# Altium PCB Insole_ver1_42.PcbDoc (part 3 of 3)
Units mm, origin at the board's own origin, x right, y up, seen from the top; angles counter-clockwise.
Board outline 154.9 x 260.57 mm, 2 copper layers (Top Layer, Bottom Layer); 254 components, 50 nets, 803 pads, 0 vias.
Unrouted connection lines stored in the file: 477.
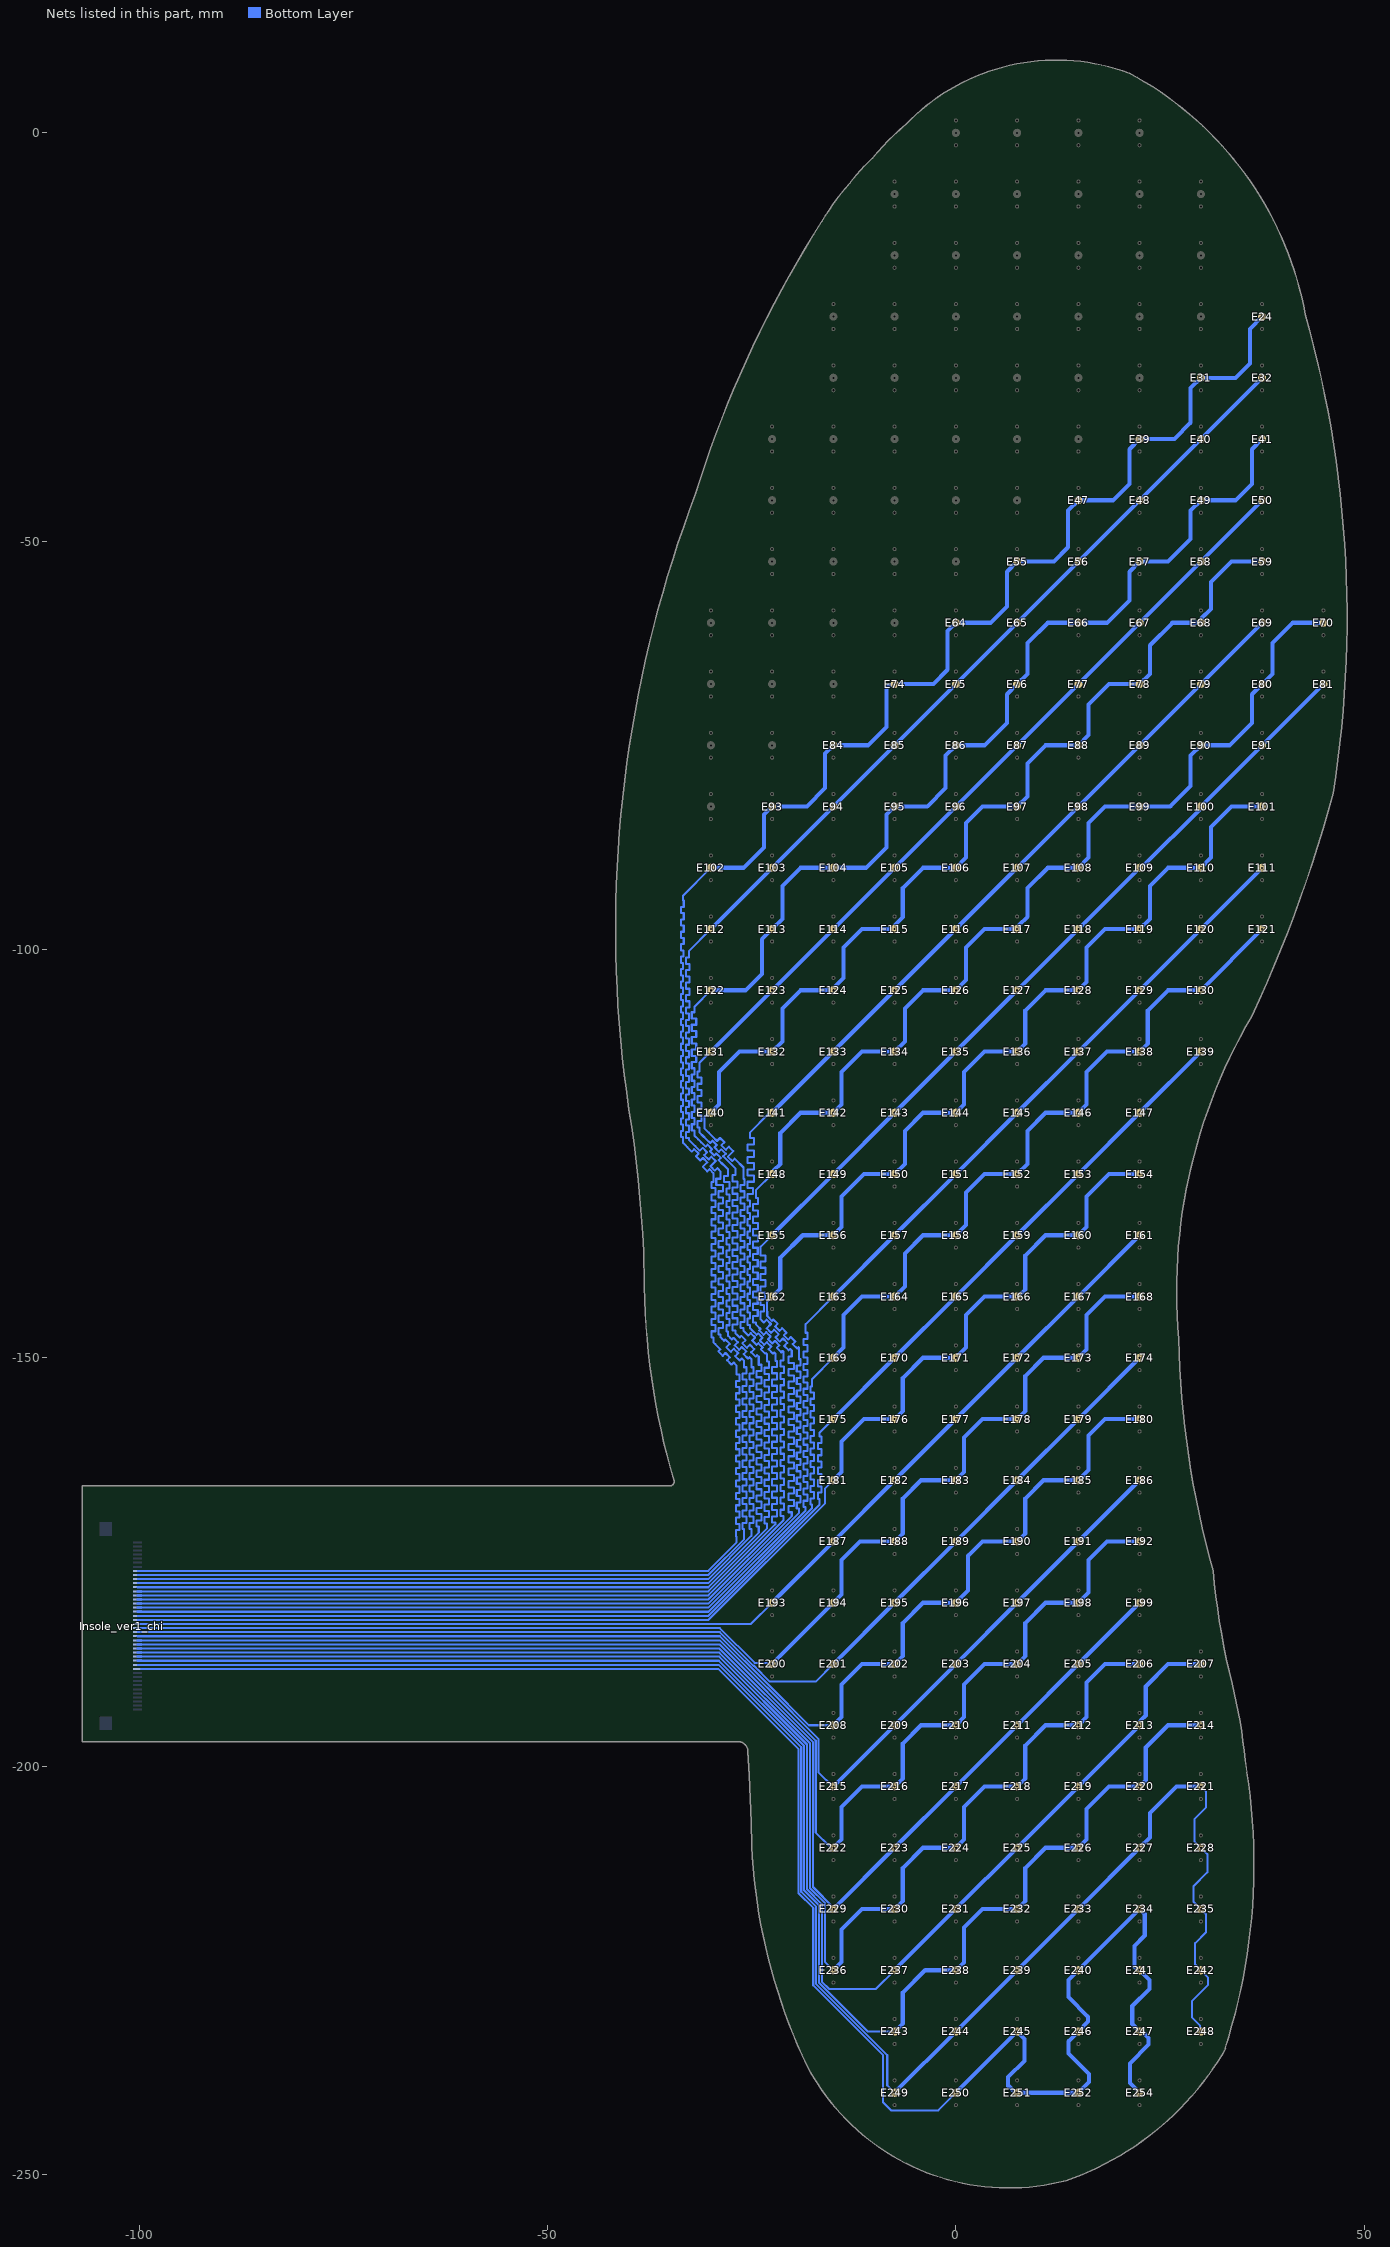
[diagram p3: the nets of this part, all layers, seen from the top]

## Nets (pads, with @x,y where several pads share a name; then routed paths per layer and width w, separated by ;. In a path a pad name is that pad's centre, name@x,y a point inside that pad or via, vN(x,y) a via of type N, cw(c..) or ccw(c..) an arc to the next point about the centre after c; other vN are vias at no path point) (continued)
Row8: E24.0 E31.0 E39.0 E47.0 E55.0 E64.0 E74.0 E84.0 E93.0 E102.0 Insole_ver1_chi.8 | length 318.3
  Bottom Layer w0.254: Insole_ver1_chi.8@-100.2,-176.1 -98.97,-176.1 -30.325,-176.1 -26.836,-172.612 -26.836,-172 -26.836,-171.873 -26.927,-171.873 -26.927,-171.111 -26.478,-171.111 -26.478,-170.349 -26.927,-170.349 -26.927,-169.587 -26.478,-169.587 -26.478,-168.825 -26.927,-168.825 -26.927,-168.063 -26.478,-168.063 -26.478,-167.301 -26.927,-167.301 -26.927,-166.539 -26.478,-166.539 -26.478,-165.777 -26.927,-165.777 -26.927,-165.015 -26.478,-165.015 -26.478,-164.253 -26.927,-164.253 -26.927,-163.491 -26.478,-163.491 -26.478,-162.729 -26.927,-162.729 -26.927,-161.967 -26.478,-161.967 -26.478,-161.205 -26.927,-161.205 -26.927,-160.443 -26.478,-160.443 -26.478,-159.681 -26.927,-159.681 -26.927,-158.919 -26.478,-158.919 -26.478,-158.157 -26.927,-158.157 -26.927,-157.395 -26.478,-157.395 -26.478,-156.633 -26.927,-156.633 -26.927,-155.871 -26.478,-155.871 -26.478,-155.109 -26.927,-155.109 -26.927,-154.347 -26.478,-154.347 -26.478,-153.585 -26.927,-153.585 -26.927,-152.823 -26.478,-152.823 -26.478,-152.061 -26.836,-152.061 -26.836,-151.3 -26.836,-150.964 -27.128,-150.672 -27.218,-150.582 -27.477,-150.842 -28.016,-150.303 -27.673,-149.96 -28.212,-149.421 -28.545,-149.755 -29.084,-149.216 -28.834,-148.966 -29.45,-148.35 -29.7,-148.1 -29.7,-147.646 -29.7,-147.519 -29.931,-147.519 -29.931,-146.757 -29.427,-146.757 -29.427,-145.995 -29.931,-145.995 -29.931,-145.233 -29.427,-145.233 -29.427,-144.471 -29.931,-144.471 -29.931,-143.709 -29.427,-143.709 -29.427,-142.947 -29.931,-142.947 -29.931,-142.185 -29.427,-142.185 -29.427,-141.423 -29.931,-141.423 -29.931,-140.661 -29.427,-140.661 -29.427,-139.899 -29.931,-139.899 -29.931,-139.137 -29.427,-139.137 -29.427,-138.375 -29.931,-138.375 -29.931,-137.613 -29.427,-137.613 -29.427,-136.851 -29.931,-136.851 -29.931,-136.089 -29.427,-136.089 -29.427,-135.327 -29.931,-135.327 -29.931,-134.565 -29.427,-134.565 -29.427,-133.803 -29.931,-133.803 -29.931,-133.041 -29.427,-133.041 -29.427,-132.279 -29.931,-132.279 -29.931,-131.517 -29.427,-131.517 -29.427,-130.755 -29.931,-130.755 -29.931,-129.993 -29.427,-129.993 -29.427,-129.231 -29.931,-129.231 -29.931,-128.469 -29.7,-128.469 -29.7,-127.7 -29.7,-127.4 -30.1,-127 -30.19,-126.91 -30.442,-127.162 -30.981,-126.623 -30.43,-126.073 -30.969,-125.534 -31.284,-125.85 -31.823,-125.311 -31.508,-124.995 -32.047,-124.456 -32.345,-124.755 -32.884,-124.216 -33.1,-124 -33.4,-123.7 -33.4,-123.106 -33.4,-122.979 -33.645,-122.979 -33.645,-122.217 -33.4,-122.217 -33.4,-121.455 -33.645,-121.455 -33.645,-120.693 -33.4,-120.693 -33.4,-119.931 -33.645,-119.931 -33.645,-119.169 -33.4,-119.169 -33.4,-118.407 -33.645,-118.407 -33.645,-117.645 -33.4,-117.645 -33.4,-116.883 -33.645,-116.883 -33.645,-116.121 -33.4,-116.121 -33.4,-115.359 -33.645,-115.359 -33.645,-114.597 -33.4,-114.597 -33.4,-113.835 -33.645,-113.835 -33.645,-113.073 -33.4,-113.073 -33.4,-112.311 -33.645,-112.311 -33.645,-111.549 -33.4,-111.549 -33.4,-110.787 -33.645,-110.787 -33.645,-110.025 -33.4,-110.025 -33.4,-109.263 -33.645,-109.263 -33.645,-108.501 -33.4,-108.501 -33.4,-107.739 -33.645,-107.739 -33.645,-106.977 -33.4,-106.977 -33.4,-106.215 -33.645,-106.215 -33.645,-105.453 -33.4,-105.453 -33.4,-104.691 -33.645,-104.691 -33.645,-103.929 -33.4,-103.929 -33.4,-103.167 -33.645,-103.167 -33.645,-102.405 -33.4,-102.405 -33.4,-101.643 -33.645,-101.643 -33.645,-100.881 -33.377,-100.881 -33.377,-100.119 -33.645,-100.119 -33.645,-99.357 -33.326,-99.357 -33.326,-98.595 -33.645,-98.595 -33.645,-97.833 -33.326,-97.833 -33.326,-97.071 -33.645,-97.071 -33.645,-96.309 -33.326,-96.309 -33.326,-95.547 -33.645,-95.547 -33.645,-94.785 -33.326,-94.785 -33.326,-94.023 -33.4,-94.023 -33.4,-93.7 -33.4,-93.4 E102.0@-30,-90
  Bottom Layer w0.5: E102.0@-30,-90 -26,-90 -23.5,-87.5 -23.5,-83.5 E93.0@-22.5,-82.5 -18.25,-82.5 -16,-80.25 -16,-76 E84.0@-15,-75 -10.75,-75 -8.5,-72.75 -8.5,-68 -8.096,-67.596 -7.596,-67.596 E74.0@-7.5,-67.5 -2.75,-67.5 -1,-65.75 -1,-61 E64.0@0,-60 4.25,-60 6.25,-58 6.25,-53.75 E55.0@7.5,-52.5 12,-52.5 13.75,-50.75 13.75,-46.25 E47.0@15,-45 19.25,-45 21.25,-43 21.25,-38.75 E39.0@22.5,-37.5 26.75,-37.5 28.75,-35.5 28.75,-31.25 E31.0@30,-30 34.25,-30 36,-28.25 36,-24 E24.0@37.5,-22.5
Row9: E32.0 E40.0 E48.0 E56.0 E65.0 E75.0 E85.0 E94.0 E103.0 E112.0 Insole_ver1_chi.9 | length 292.8
  Bottom Layer w0.254: Insole_ver1_chi.9@-100.2,-176.6 -98.97,-176.6 -30.322,-176.6 -25.936,-172.214 -25.936,-171.1 -25.936,-170.973 -26.123,-170.973 -26.123,-170.211 -25.646,-170.211 -25.646,-169.449 -26.123,-169.449 -26.123,-168.687 -25.646,-168.687 -25.646,-167.925 -26.123,-167.925 -26.123,-167.163 -25.646,-167.163 -25.646,-166.401 -26.123,-166.401 -26.123,-165.639 -25.646,-165.639 -25.646,-164.877 -26.123,-164.877 -26.123,-164.115 -25.646,-164.115 -25.646,-163.353 -26.123,-163.353 -26.123,-162.591 -25.646,-162.591 -25.646,-161.829 -26.123,-161.829 -26.123,-161.067 -25.646,-161.067 -25.646,-160.305 -26.123,-160.305 -26.123,-159.543 -25.646,-159.543 -25.646,-158.781 -26.123,-158.781 -26.123,-158.019 -25.646,-158.019 -25.646,-157.257 -26.123,-157.257 -26.123,-156.495 -25.646,-156.495 -25.646,-155.733 -26.123,-155.733 -26.123,-154.971 -25.646,-154.971 -25.646,-154.209 -26.123,-154.209 -26.123,-153.447 -25.646,-153.447 -25.646,-152.685 -26.123,-152.685 -26.123,-151.923 -25.646,-151.923 -25.646,-151.161 -25.936,-151.161 -25.936,-150.7 -25.936,-150.364 -26.13,-150.17 -26.22,-150.08 -26.482,-150.342 -27.021,-149.803 -26.638,-149.42 -27.177,-148.881 -27.56,-149.265 -28.099,-148.726 -27.681,-148.308 -28.22,-147.769 -28.375,-147.925 -28.6,-147.7 -28.8,-147.5 -28.8,-147.261 -28.8,-147.134 -29.071,-147.134 -29.071,-146.372 -28.522,-146.372 -28.522,-145.61 -29.071,-145.61 -29.071,-144.848 -28.522,-144.848 -28.522,-144.086 -29.071,-144.086 -29.071,-143.324 -28.522,-143.324 -28.522,-142.562 -29.071,-142.562 -29.071,-141.8 -28.522,-141.8 -28.522,-141.038 -29.071,-141.038 -29.071,-140.276 -28.522,-140.276 -28.522,-139.514 -29.071,-139.514 -29.071,-138.752 -28.522,-138.752 -28.522,-137.99 -29.071,-137.99 -29.071,-137.228 -28.522,-137.228 -28.522,-136.466 -29.071,-136.466 -29.071,-135.704 -28.522,-135.704 -28.522,-134.942 -29.071,-134.942 -29.071,-134.18 -28.522,-134.18 -28.522,-133.418 -29.071,-133.418 -29.071,-132.656 -28.522,-132.656 -28.522,-131.894 -29.071,-131.894 -29.071,-131.132 -28.522,-131.132 -28.522,-130.37 -29.071,-130.37 -29.071,-129.608 -28.522,-129.608 -28.522,-128.846 -29.344,-128.846 -29.344,-128.084 -28.8,-128.084 -28.8,-127.6 -28.8,-127.2 -29.115,-126.885 -29.205,-126.795 -29.503,-127.094 -30.042,-126.555 -29.395,-125.908 -29.934,-125.369 -30.282,-125.718 -30.821,-125.179 -30.473,-124.83 -31.011,-124.292 -31.36,-124.64 -31.899,-124.101 -32.2,-123.8 -32.7,-123.3 ; -32.7,-123.233 -32.7,-123.106 -33.044,-123.106 -33.044,-122.344 -32.7,-122.344 -32.7,-121.582 -33.044,-121.582 -33.044,-120.82 -32.7,-120.82 -32.7,-120.058 -33.044,-120.058 -33.044,-119.296 -32.7,-119.296 -32.7,-118.534 -33.044,-118.534 -33.044,-117.772 -32.7,-117.772 -32.7,-117.01 -33.044,-117.01 -33.044,-116.248 -32.7,-116.248 -32.7,-115.486 -33.044,-115.486 -33.044,-114.724 -32.7,-114.724 -32.7,-113.962 -33.044,-113.962 -33.044,-113.2 -32.7,-113.2 -32.7,-112.438 -33.044,-112.438 -33.044,-111.676 -32.7,-111.676 -32.7,-110.914 -33.044,-110.914 -33.044,-110.152 -32.7,-110.152 -32.7,-109.39 -33.044,-109.39 -33.044,-108.628 -32.7,-108.628 -32.7,-107.866 -33.044,-107.866 -33.044,-107.104 -32.624,-107.104 -32.624,-106.342 -33.044,-106.342 -33.044,-105.58 -32.624,-105.58 -32.624,-104.818 -33.044,-104.818 -33.044,-104.056 -32.624,-104.056 -32.624,-103.294 -33.044,-103.294 -33.044,-102.532 -32.624,-102.532 -32.624,-101.77 -33.044,-101.77 -33.044,-101.008 -32.7,-101.008 -32.7,-100.6 -32.7,-100.2 E112.0@-30,-97.5
  Bottom Layer w0.5: E112.0@-30,-97.5 E103.0@-22.5,-90 E94.0@-15,-82.5 E85.0@-7.5,-75 E75.0@0,-67.5 E65.0@7.5,-60 E56.0@15,-52.5 E48.0@22.5,-45 E32.0@37.5,-30
Row10: E41.0 E49.0 E57.0 E66.0 E76.0 E86.0 E95.0 E104.0 E113.0 E122.0 Insole_ver1_chi.10 | length 299.8
  Bottom Layer w0.254: Insole_ver1_chi.10@-100.2,-177.1 -98.97,-177.1 -30.319,-177.1 -25.036,-171.817 -25.036,-171.1 -25.036,-170.973 -25.29,-170.973 -25.29,-170.211 -24.765,-170.211 -24.765,-169.449 -25.29,-169.449 -25.29,-168.687 -24.765,-168.687 -24.765,-167.925 -25.29,-167.925 -25.29,-167.163 -24.765,-167.163 -24.765,-166.401 -25.29,-166.401 -25.29,-165.639 -24.765,-165.639 -24.765,-164.877 -25.29,-164.877 -25.29,-164.115 -24.765,-164.115 -24.765,-163.353 -25.29,-163.353 -25.29,-162.591 -24.765,-162.591 -24.765,-161.829 -25.29,-161.829 -25.29,-161.067 -24.765,-161.067 -24.765,-160.305 -25.29,-160.305 -25.29,-159.543 -24.765,-159.543 -24.765,-158.781 -25.29,-158.781 -25.29,-158.019 -24.765,-158.019 -24.765,-157.257 -25.29,-157.257 -25.29,-156.495 -24.765,-156.495 -24.765,-155.733 -25.29,-155.733 -25.29,-154.971 -24.765,-154.971 -24.765,-154.209 -25.29,-154.209 -25.29,-153.447 -24.765,-153.447 -24.765,-152.685 -25.29,-152.685 -25.29,-151.923 -24.765,-151.923 -24.765,-151.161 -25.036,-151.161 -25.036,-150.8 -25.036,-150.164 -25.19,-150.01 -25.28,-149.92 -25.457,-150.098 -25.996,-149.559 -25.662,-149.226 -26.201,-148.687 -26.535,-149.02 -27.074,-148.481 -26.691,-148.099 -27.23,-147.56 -27.435,-147.765 -27.65,-147.55 -27.9,-147.3 -27.9,-146.909 -27.9,-146.782 -28.104,-146.782 -28.104,-146.02 -27.714,-146.02 -27.714,-145.258 -28.104,-145.258 -28.104,-144.496 -27.714,-144.496 -27.714,-143.734 -28.104,-143.734 -28.104,-142.972 -27.714,-142.972 -27.714,-142.21 -28.104,-142.21 -28.104,-141.448 -27.714,-141.448 -27.714,-140.686 -28.104,-140.686 -28.104,-139.924 -27.714,-139.924 -27.714,-139.162 -28.104,-139.162 -28.104,-138.4 -27.714,-138.4 -27.714,-137.638 -28.104,-137.638 -28.104,-136.876 -27.714,-136.876 -27.714,-136.114 -28.104,-136.114 -28.104,-135.352 -27.714,-135.352 -27.714,-134.59 -28.104,-134.59 -28.104,-133.828 -27.714,-133.828 -27.714,-133.066 -28.104,-133.066 -28.104,-132.304 -27.714,-132.304 -27.714,-131.542 -28.104,-131.542 -28.104,-130.78 -27.714,-130.78 -27.714,-130.018 -28.104,-130.018 -28.104,-129.256 -27.714,-129.256 -27.714,-128.494 -28.409,-128.494 -28.409,-127.732 -27.9,-127.732 -27.9,-127.3 -27.9,-126.9 -28.4,-126.4 -28.49,-126.31 -28.518,-126.338 -29.056,-125.799 -28.78,-125.523 -29.319,-124.984 -29.567,-125.233 -30.106,-124.694 -29.858,-124.445 -30.397,-123.906 -30.645,-124.155 -31.184,-123.616 -31.55,-123.25 -32,-122.8 -32,-122.3 -32,-122.173 -32.344,-122.173 -32.344,-121.411 -32,-121.411 -32,-120.649 -32.344,-120.649 -32.344,-119.887 -32,-119.887 -32,-119.125 -32.344,-119.125 -32.344,-118.363 -32,-118.363 -32,-117.601 -32.344,-117.601 -32.344,-116.839 -32,-116.839 -32,-116.077 -32.344,-116.077 -32.344,-115.315 -32,-115.315 -32,-114.553 -32.344,-114.553 -32.344,-113.791 -31.791,-113.791 -31.791,-113.029 -32.344,-113.029 -32.344,-112.267 -31.791,-112.267 -31.791,-111.505 -32.344,-111.505 -32.344,-110.743 -31.791,-110.743 -31.791,-109.981 -32.344,-109.981 -32.344,-109.219 -31.791,-109.219 -31.791,-108.457 -32.344,-108.457 -32.344,-107.695 -32,-107.695 -32,-107.5 -32,-107 E122.0@-30,-105
  Bottom Layer w0.5: E122.0@-30,-105 -25.75,-105 -23.75,-103 -23.75,-98.75 E113.0@-22.5,-97.5 -21.25,-96.25 -21.25,-92.25 -19,-90 E104.0@-15,-90 -11,-90 -8.5,-87.5 -8.5,-83.5 E95.0@-7.5,-82.5 -3.5,-82.5 -1.25,-80.25 -1.25,-76.25 E86.0@0,-75 3.5,-75 6.25,-72.25 6.25,-68.75 E76.0@7.5,-67.5 8.75,-66.25 8.75,-62.5 11.25,-60 E66.0@15,-60 18.5,-60 21.25,-57.25 21.25,-53.75 E57.0@22.5,-52.5 26,-52.5 28.75,-49.75 28.75,-46.25 E49.0@30,-45 34.25,-45 36.25,-43 36.25,-38.75 E41.0@37.5,-37.5
Row11: E50.0 E58.0 E67.0 E77.0 E87.0 E96.0 E105.0 E114.0 E123.0 E131.0 Insole_ver1_chi.11 | length 276.3
  Bottom Layer w0.254: Insole_ver1_chi.11@-100.2,-177.6 -98.97,-177.6 -30.316,-177.6 -24.136,-171.42 -24.136,-170.8 -24.136,-170.673 -24.409,-170.673 -24.409,-169.911 -23.802,-169.911 -23.802,-169.149 -24.409,-169.149 -24.409,-168.387 -23.802,-168.387 -23.802,-167.625 -24.409,-167.625 -24.409,-166.863 -23.802,-166.863 -23.802,-166.101 -24.409,-166.101 -24.409,-165.339 -23.802,-165.339 -23.802,-164.577 -24.409,-164.577 -24.409,-163.815 -23.802,-163.815 -23.802,-163.053 -24.409,-163.053 -24.409,-162.291 -23.802,-162.291 -23.802,-161.529 -24.409,-161.529 -24.409,-160.767 -23.802,-160.767 -23.802,-160.005 -24.409,-160.005 -24.409,-159.243 -23.802,-159.243 -23.802,-158.481 -24.409,-158.481 -24.409,-157.719 -23.802,-157.719 -23.802,-156.957 -24.409,-156.957 -24.409,-156.195 -23.802,-156.195 -23.802,-155.433 -24.409,-155.433 -24.409,-154.671 -23.802,-154.671 -23.802,-153.909 -24.409,-153.909 -24.409,-153.147 -23.802,-153.147 -23.802,-152.385 -24.409,-152.385 -24.409,-151.623 -23.802,-151.623 -23.802,-150.861 -24.136,-150.861 -24.136,-150.2 -24.136,-149.864 -24.239,-149.761 -24.329,-149.671 -24.521,-149.864 -25.06,-149.325 -24.67,-148.935 -25.209,-148.396 -25.599,-148.786 -26.138,-148.247 -25.748,-147.857 -26.287,-147.319 -26.484,-147.516 -26.8,-147.2 -27,-147 -27,-146.809 -27,-146.682 -27.359,-146.682 -27.359,-145.92 -26.741,-145.92 -26.741,-145.158 -27.359,-145.158 -27.359,-144.396 -26.741,-144.396 -26.741,-143.634 -27.359,-143.634 -27.359,-142.872 -26.741,-142.872 -26.741,-142.11 -27.359,-142.11 -27.359,-141.348 -26.741,-141.348 -26.741,-140.586 -27.359,-140.586 -27.359,-139.824 -26.741,-139.824 -26.741,-139.062 -27.359,-139.062 -27.359,-138.3 -26.741,-138.3 -26.741,-137.538 -27.359,-137.538 -27.359,-136.776 -26.741,-136.776 -26.741,-136.014 -27.359,-136.014 -27.359,-135.252 -26.741,-135.252 -26.741,-134.49 -27.359,-134.49 -27.359,-133.728 -26.741,-133.728 -26.741,-132.966 -27.359,-132.966 -27.359,-132.204 -26.741,-132.204 -26.741,-131.442 -27.359,-131.442 -27.359,-130.68 -26.741,-130.68 -26.741,-129.918 -27.359,-129.918 -27.359,-129.156 -26.741,-129.156 -26.741,-128.394 -27.373,-128.394 -27.373,-127.632 -27,-127.632 -27,-127.1 -27,-126.8 -27.85,-125.95 -27.94,-125.86 -27.945,-125.865 -28.484,-125.326 -28.18,-125.023 -28.719,-124.484 -29.017,-124.783 -29.556,-124.244 -29.258,-123.945 -29.797,-123.406 -30.095,-123.705 -30.634,-123.166 -30.9,-122.9 -31.4,-122.4 -31.4,-121.909 -31.4,-121.782 -31.644,-121.782 -31.644,-121.02 -31.156,-121.02 -31.156,-120.258 -31.644,-120.258 -31.644,-119.496 -31.149,-119.496 -31.149,-118.734 -31.644,-118.734 -31.644,-117.972 -31.149,-117.972 -31.149,-117.21 -31.644,-117.21 -31.644,-116.448 -31.149,-116.448 -31.149,-115.686 -31.644,-115.686 -31.644,-114.924 -31.4,-114.924 -31.4,-114.4 -31.4,-113.9 E131.0@-30,-112.5
  Bottom Layer w0.5: E131.0@-30,-112.5 E123.0@-22.5,-105 E114.0@-15,-97.5 E105.0@-7.5,-90 E96.0@0,-82.5 E87.0@7.5,-75 E77.0@15,-67.5 E67.0@22.5,-60 E58.0@30,-52.5 E50.0@37.5,-45
Row12: E59.0 E68.0 E78.0 E88.0 E97.0 E106.0 E115.0 E124.0 E132.0 E140.0 Insole_ver1_chi.12 | length 282.3
  Bottom Layer w0.254: Insole_ver1_chi.12@-100.2,-178.1 -98.97,-178.1 -30.313,-178.1 -23.136,-170.923 -23.136,-170.4 -23.136,-170.273 -23.446,-170.273 -23.446,-169.511 -22.871,-169.511 -22.871,-168.749 -23.446,-168.749 -23.446,-167.987 -22.871,-167.987 -22.871,-167.225 -23.446,-167.225 -23.446,-166.463 -22.871,-166.463 -22.871,-165.701 -23.446,-165.701 -23.446,-164.939 -22.871,-164.939 -22.871,-164.177 -23.446,-164.177 -23.446,-163.415 -22.871,-163.415 -22.871,-162.653 -23.446,-162.653 -23.446,-161.891 -22.871,-161.891 -22.871,-161.129 -23.446,-161.129 -23.446,-160.367 -22.871,-160.367 -22.871,-159.605 -23.446,-159.605 -23.446,-158.843 -22.871,-158.843 -22.871,-158.081 -23.446,-158.081 -23.446,-157.319 -22.871,-157.319 -22.871,-156.557 -23.446,-156.557 -23.446,-155.795 -22.871,-155.795 -22.871,-155.033 -23.446,-155.033 -23.446,-154.271 -22.871,-154.271 -22.871,-153.509 -23.446,-153.509 -23.446,-152.747 -22.871,-152.747 -22.871,-151.985 -23.446,-151.985 -23.446,-151.223 -22.871,-151.223 -22.871,-150.461 -23.136,-150.461 -23.136,-149.782 -23.136,-149.564 -23.175,-149.525 -23.264,-149.436 -23.333,-149.505 -23.872,-148.966 -23.651,-148.745 -24.19,-148.206 -24.411,-148.427 -24.95,-147.888 -24.582,-147.521 -25.121,-146.982 -25.42,-147.28 -25.85,-146.85 -26,-146.7 -26,-146.5 -26,-146.373 -26.385,-146.373 -26.385,-145.611 -25.887,-145.611 -25.887,-144.849 -26.385,-144.849 -26.385,-144.087 -25.887,-144.087 -25.887,-143.325 -26.385,-143.325 -26.385,-142.563 -25.887,-142.563 -25.887,-141.801 -26.385,-141.801 -26.385,-141.039 -25.887,-141.039 -25.887,-140.277 -26.385,-140.277 -26.385,-139.515 -25.887,-139.515 -25.887,-138.753 -26.385,-138.753 -26.385,-137.991 -25.887,-137.991 -25.887,-137.229 -26.385,-137.229 -26.385,-136.467 -25.887,-136.467 -25.887,-135.705 -26.385,-135.705 -26.385,-134.943 -25.887,-134.943 -25.887,-134.181 -26.385,-134.181 -26.385,-133.419 -25.887,-133.419 -25.887,-132.657 -26.385,-132.657 -26.385,-131.895 -25.887,-131.895 -25.887,-131.133 -26.385,-131.133 -26.385,-130.371 -25.887,-130.371 -25.887,-129.609 -26.385,-129.609 -26.385,-128.847 -25.887,-128.847 -25.887,-128.085 -26,-128.085 -26,-127.2 -26,-126.7 -27,-125.7 -27.09,-125.61 -27.388,-125.909 -27.927,-125.37 -27.26,-124.703 -27.799,-124.164 -28.167,-124.533 -28.706,-123.994 -28.338,-123.625 -28.877,-123.087 -29.245,-123.455 -29.784,-122.916 -30.25,-122.45 -30.8,-121.9 -30.8,-120.5 -30.519,-120.219 -30.421,-120.219 -30.202,-120 E140.0@-30,-120
  Bottom Layer w0.5: E140.0@-30,-120 -29,-119 -29,-115 -26.5,-112.5 E132.0@-22.5,-112.5 -21.25,-111.25 -21.25,-107.25 -19,-105 E124.0@-15,-105 -15,-104.865 -14.75,-104.615 -14.75,-104.5 -13.75,-103.5 -13.75,-99.75 -11.5,-97.5 E115.0@-7.5,-97.5 -7.404,-97.404 -7.404,-96.947 -6.5,-96.042 -6.5,-92.5 -4,-90 E106.0@0,-90 1.25,-88.75 1.25,-84.5 3.25,-82.5 E97.0@7.5,-82.5 8.75,-81.25 8.75,-77.25 11,-75 E88.0@15,-75 16.25,-73.75 16.25,-70 18.75,-67.5 E78.0@22.5,-67.5 23.75,-66.25 23.75,-62.75 26.5,-60 E68.0@30,-60 30.096,-59.904 30.096,-59.447 31.25,-58.292 31.25,-55 33.75,-52.5 E59.0@37.5,-52.5
Row13: E69.0 E79.0 E89.0 E98.0 E107.0 E116.0 E125.0 E133.0 E141.0 Insole_ver1_chi.13 | length 251.8
  Bottom Layer w0.254: Insole_ver1_chi.13@-100.2,-178.6 -98.97,-178.6 -30.31,-178.6 -22.1,-170.39 -22.1,-170.316 -22.1,-170.189 -22.515,-170.189 -22.515,-169.427 -21.896,-169.427 -21.896,-168.665 -22.515,-168.665 -22.515,-167.903 -21.896,-167.903 -21.896,-167.141 -22.515,-167.141 -22.515,-166.379 -21.896,-166.379 -21.896,-165.617 -22.515,-165.617 -22.515,-164.855 -21.896,-164.855 -21.896,-164.093 -22.515,-164.093 -22.515,-163.331 -21.896,-163.331 -21.896,-162.569 -22.515,-162.569 -22.515,-161.807 -21.896,-161.807 -21.896,-161.045 -22.515,-161.045 -22.515,-160.283 -21.896,-160.283 -21.896,-159.521 -22.515,-159.521 -22.515,-158.759 -21.896,-158.759 -21.896,-157.997 -22.515,-157.997 -22.515,-157.235 -21.896,-157.235 -21.896,-156.473 -22.515,-156.473 -22.515,-155.711 -21.896,-155.711 -21.896,-154.949 -22.515,-154.949 -22.515,-154.187 -21.896,-154.187 -21.896,-153.425 -22.515,-153.425 -22.515,-152.663 -21.896,-152.663 -21.896,-151.901 -22.515,-151.901 -22.515,-151.139 -21.896,-151.139 -21.896,-150.377 -22.1,-150.377 -22.1,-149.8 -22.1,-149.5 -22.157,-149.443 -22.247,-149.353 -22.394,-149.499 -22.932,-148.96 -22.598,-148.626 -23.137,-148.087 -23.471,-148.422 -24.01,-147.883 -23.675,-147.548 -24.214,-147.009 -24.402,-147.198 -25,-146.6 -25.2,-146.4 -25.2,-146.1 -25.2,-145.973 -25.525,-145.973 -25.525,-145.211 -25.2,-145.211 -25.2,-144.449 -25.525,-144.449 -25.525,-143.687 -25.2,-143.687 -25.2,-142.925 -25.525,-142.925 -25.525,-142.163 -25.2,-142.163 -25.2,-141.401 -25.525,-141.401 -25.525,-140.639 -25.2,-140.639 -25.2,-139.877 -25.525,-139.877 -25.525,-139.115 -25.2,-139.115 -25.2,-138.353 -25.525,-138.353 -25.525,-137.591 -25.2,-137.591 -25.2,-136.829 -25.525,-136.829 -25.525,-136.067 -25.2,-136.067 -25.2,-135.305 -25.525,-135.305 -25.525,-134.543 -25.2,-134.543 -25.2,-133.781 -25.525,-133.781 -25.525,-133.019 -25.2,-133.019 -25.2,-132.257 -25.525,-132.257 -25.525,-131.495 -25.2,-131.495 -25.2,-130.733 -25.525,-130.733 -25.525,-129.971 -24.856,-129.971 -24.856,-129.209 -25.525,-129.209 -25.525,-128.447 -24.698,-128.447 -24.698,-127.685 -25.525,-127.685 -25.525,-126.923 -24.698,-126.923 -24.698,-126.161 -25.525,-126.161 -25.525,-125.399 -24.698,-125.399 -24.698,-124.637 -25.525,-124.637 -25.525,-123.875 -24.698,-123.875 -24.698,-123.113 -25.2,-123.113 -25.2,-122.4 -23.019,-120.219 -22.921,-120.219 -22.702,-120 E141.0@-22.5,-120
  Bottom Layer w0.5: E141.0@-22.5,-120 E69.0@37.5,-60
Row14: E70.0 E80.0 E90.0 E99.0 E108.0 E117.0 E126.0 E134.0 E142.0 E148.0 Insole_ver1_chi.14 | length 267.6
  Bottom Layer w0.254: Insole_ver1_chi.14@-100.2,-179.1 -98.97,-179.1 -30.307,-179.1 -21.1,-169.893 -21.1,-169.5 -21.1,-169.373 -21.451,-169.373 -21.451,-168.611 -21.064,-168.611 -21.064,-167.849 -21.451,-167.849 -21.451,-167.087 -21.064,-167.087 -21.064,-166.325 -21.451,-166.325 -21.451,-165.563 -21.064,-165.563 -21.064,-164.801 -21.451,-164.801 -21.451,-164.039 -21.064,-164.039 -21.064,-163.277 -21.451,-163.277 -21.451,-162.515 -21.064,-162.515 -21.064,-161.753 -21.451,-161.753 -21.451,-160.991 -21.064,-160.991 -21.064,-160.229 -21.451,-160.229 -21.451,-159.467 -21.064,-159.467 -21.064,-158.705 -21.451,-158.705 -21.451,-157.943 -21.064,-157.943 -21.064,-157.181 -21.451,-157.181 -21.451,-156.419 -21.064,-156.419 -21.064,-155.657 -21.451,-155.657 -21.451,-154.895 -21.064,-154.895 -21.064,-154.133 -21.451,-154.133 -21.451,-153.371 -21.064,-153.371 -21.064,-152.609 -21.451,-152.609 -21.451,-151.847 -21.064,-151.847 -21.064,-151.085 -21.451,-151.085 -21.451,-150.323 -21.1,-150.323 -21.1,-150 -21.1,-149.3 -21.135,-149.265 -21.224,-149.176 -21.385,-149.336 -21.924,-148.797 -21.604,-148.477 -22.143,-147.939 -22.462,-148.258 -23.001,-147.719 -22.682,-147.4 -23.22,-146.861 -23.54,-147.181 -24.079,-146.642 -23.919,-146.481 -24.3,-146.1 -24.5,-145.9 -24.5,-145.8 -24.5,-145.673 -24.844,-145.673 -24.844,-144.911 -24.256,-144.911 -24.256,-144.149 -24.844,-144.149 -24.844,-143.387 -24.256,-143.387 -24.256,-142.625 -24.844,-142.625 -24.844,-141.863 -24.256,-141.863 -24.256,-141.101 -24.844,-141.101 -24.844,-140.339 -24.256,-140.339 -24.256,-139.577 -24.844,-139.577 -24.844,-138.815 -24.256,-138.815 -24.256,-138.053 -24.844,-138.053 -24.844,-137.291 -24.256,-137.291 -24.256,-136.529 -24.844,-136.529 -24.844,-135.767 -24.249,-135.767 -24.249,-135.005 -24.844,-135.005 -24.844,-134.243 -24.249,-134.243 -24.249,-133.481 -24.844,-133.481 -24.844,-132.719 -24.249,-132.719 -24.249,-131.957 -24.844,-131.957 -24.844,-131.195 -24.249,-131.195 -24.249,-130.433 -24.5,-130.433 -24.5,-129.8 -24.5,-129.5 E148.0@-22.5,-127.5
  Bottom Layer w0.5: E148.0@-22.5,-127.5 -22.5,-127.365 -22.25,-127.115 -22.25,-127 -21.5,-126.25 -21.5,-122.5 -19,-120 E142.0@-15,-120 -14,-119 -14,-115 -11.5,-112.5 E134.0@-7.5,-112.5 -6.25,-111.25 -6.25,-107.25 -4,-105 E126.0@0,-105 1.25,-103.75 1.25,-99.75 3.5,-97.5 E117.0@7.5,-97.5 7.5,-97.365 7.75,-97.115 7.75,-97 8.75,-96 8.75,-92.5 11.25,-90 E108.0@15,-90 16.25,-88.75 16.25,-84.5 18.25,-82.5 E99.0@22.5,-82.5 26.25,-82.5 28.75,-80 28.75,-76.25 E90.0@30,-75 33.5,-75 36.25,-72.25 36.25,-68.75 38.75,-66.25 38.75,-62.5 41.25,-60 E70.0@45,-60
Row15: E81.0 E91.0 E100.0 E109.0 E118.0 E127.0 E135.0 E143.0 E149.0 E155.0 Insole_ver1_chi.15 | length 241.8
  Bottom Layer w0.254: Insole_ver1_chi.15@-100.2,-179.6 -98.97,-179.6 -30.304,-179.6 -20.1,-169.396 -20.1,-169.046 -20.1,-168.919 -20.488,-168.919 -20.488,-168.157 -19.843,-168.157 -19.843,-167.395 -20.488,-167.395 -20.488,-166.633 -19.843,-166.633 -19.843,-165.871 -20.488,-165.871 -20.488,-165.109 -19.843,-165.109 -19.843,-164.347 -20.488,-164.347 -20.488,-163.585 -19.843,-163.585 -19.843,-162.823 -20.488,-162.823 -20.488,-162.061 -19.843,-162.061 -19.843,-161.299 -20.488,-161.299 -20.488,-160.537 -19.843,-160.537 -19.843,-159.775 -20.488,-159.775 -20.488,-159.013 -19.843,-159.013 -19.843,-158.251 -20.488,-158.251 -20.488,-157.489 -19.843,-157.489 -19.843,-156.727 -20.488,-156.727 -20.488,-155.965 -19.843,-155.965 -19.843,-155.203 -20.488,-155.203 -20.488,-154.441 -19.843,-154.441 -19.843,-153.679 -20.488,-153.679 -20.488,-152.917 -19.843,-152.917 -19.843,-152.155 -20.488,-152.155 -20.488,-151.393 -19.843,-151.393 -19.843,-150.631 -20.488,-150.631 -20.488,-149.869 -20.1,-149.869 -20.1,-149.5 -20.1,-149.1 -20.197,-149.003 -20.287,-148.913 -20.476,-149.102 -21.015,-148.563 -20.634,-148.182 -21.173,-147.643 -21.554,-148.024 -22.093,-147.485 -21.712,-147.104 -22.251,-146.566 -22.632,-146.947 -23.171,-146.408 -22.633,-145.87 -23.172,-145.331 -23.52,-145.68 -23.7,-145.5 -23.9,-145.3 -23.9,-145.2 -23.9,-144.311 -23.487,-144.311 -23.487,-143.549 -23.9,-143.549 -23.9,-142.787 -23.381,-142.787 -23.381,-142.025 -23.9,-142.025 -23.9,-141.263 -23.315,-141.263 -23.315,-140.501 -23.9,-140.501 -23.9,-139.739 -23.315,-139.739 -23.315,-138.977 -23.9,-138.977 -23.9,-138.215 -23.315,-138.215 -23.315,-137.453 -23.9,-137.453 -23.9,-136.4 E155.0@-22.5,-135
  Bottom Layer w0.5: E155.0@-22.5,-135 E149.0@-15,-127.5 E143.0@-7.5,-120 E109.0@22.5,-90 22.635,-90 22.885,-89.75 23,-89.75 29.904,-82.846 29.904,-82.596 E100.0@30,-82.5 E81.0@45,-67.5
Row16: E101.0 E110.0 E119.0 E128.0 E136.0 E144.0 E150.0 E156.0 E162.0 Insole_ver1_chi.16 | length 231.3
  Bottom Layer w0.254: Insole_ver1_chi.16@-100.2,-180.1 -98.97,-180.1 -30.301,-180.1 -19.2,-168.999 -19.2,-168.6 -19.2,-168.473 -19.488,-168.473 -19.488,-167.711 -19.014,-167.711 -19.014,-166.949 -19.488,-166.949 -19.488,-166.187 -19.014,-166.187 -19.014,-165.425 -19.488,-165.425 -19.488,-164.663 -19.014,-164.663 -19.014,-163.901 -19.488,-163.901 -19.488,-163.139 -19.014,-163.139 -19.014,-162.377 -19.488,-162.377 -19.488,-161.615 -19.014,-161.615 -19.014,-160.853 -19.488,-160.853 -19.488,-160.091 -19.014,-160.091 -19.014,-159.329 -19.488,-159.329 -19.488,-158.567 -19.014,-158.567 -19.014,-157.805 -19.488,-157.805 -19.488,-157.043 -19.014,-157.043 -19.014,-156.281 -19.488,-156.281 -19.488,-155.519 -19.014,-155.519 -19.014,-154.757 -19.488,-154.757 -19.488,-153.995 -19.014,-153.995 -19.014,-153.233 -19.488,-153.233 -19.488,-152.471 -19.014,-152.471 -19.014,-151.709 -19.488,-151.709 -19.488,-150.947 -19.014,-150.947 -19.014,-150.185 -19.2,-150.185 -19.2,-149.342 -19.2,-148.8 -19.29,-148.71 -19.446,-148.867 -19.985,-148.328 -19.661,-148.003 -20.2,-147.465 -20.524,-147.789 -21.063,-147.25 -20.738,-146.926 -21.277,-146.387 -21.602,-146.712 -22.141,-146.173 -21.816,-145.848 -22.355,-145.309 -22.523,-145.477 -23,-145 -23.1,-144.9 -23.1,-144.316 -23.131,-144.285 -23.131,-143.131 E162.0@-22.5,-142.5
  Bottom Layer w0.5: E162.0@-22.5,-142.5 -21.5,-141.5 -21.5,-137.75 -18.75,-135 E156.0@-15,-135 -14,-134 -14,-130.25 -11.25,-127.5 E150.0@-7.5,-127.5 -6.25,-126.25 -6.25,-122.25 -4,-120 E144.0@0,-120 ; E144.0@0.096,-119.904 1,-119 1,-115 3.5,-112.5 E136.0@7.5,-112.5 8.5,-111.5 8.5,-107.5 11,-105 E128.0@15,-105 16,-104 16,-99.75 18.25,-97.5 E119.0@22.5,-97.5 23.75,-96.25 23.75,-92.25 26,-90 E110.0@30,-90 31.25,-88.75 31.25,-85 33.75,-82.5 E101.0@37.5,-82.5
Row17: E111.0 E120.0 E129.0 E137.0 E145.0 E151.0 E157.0 E163.0 Insole_ver1_chi.17 | length 202.3
  Bottom Layer w0.254: Insole_ver1_chi.17@-100.2,-180.6 -98.97,-180.6 -30.299,-180.6 -18.4,-168.701 -18.4,-168.4 -18.4,-168.273 -18.658,-168.273 -18.658,-167.511 -18.168,-167.511 -18.168,-166.749 -18.658,-166.749 -18.658,-165.987 -18.168,-165.987 -18.168,-165.225 -18.658,-165.225 -18.658,-164.463 -18.168,-164.463 -18.168,-163.701 -18.658,-163.701 -18.658,-162.939 -18.168,-162.939 -18.168,-162.177 -18.658,-162.177 -18.658,-161.415 -18.168,-161.415 -18.168,-160.653 -18.658,-160.653 -18.658,-159.891 -18.168,-159.891 -18.168,-159.129 -18.658,-159.129 -18.658,-158.367 -18.168,-158.367 -18.168,-157.605 -18.658,-157.605 -18.658,-156.843 -18.168,-156.843 -18.168,-156.081 -18.658,-156.081 -18.658,-155.319 -18.168,-155.319 -18.168,-154.557 -18.658,-154.557 -18.658,-153.795 -18.168,-153.795 -18.168,-153.033 -18.658,-153.033 -18.658,-152.271 -18.168,-152.271 -18.168,-151.509 -18.658,-151.509 -18.658,-150.747 -18.168,-150.747 -18.168,-149.985 -18.658,-149.985 -18.658,-149.223 -18.168,-149.223 -18.168,-148.461 -18.658,-148.461 -18.658,-147.699 -18.168,-147.699 -18.168,-146.937 -18.4,-146.937 -18.4,-146.2 -18.4,-145.9 E163.0@-15,-142.5
  Bottom Layer w0.5: E163.0@-15,-142.5 E157.0@-7.5,-135 E151.0@0,-127.5 E145.0@7.5,-120 E137.0@15,-112.5 E129.0@22.5,-105 E120.0@30,-97.5 E111.0@37.5,-90
Row18: E121.0 E130.0 E138.0 E146.0 E152.0 E158.0 E164.0 E169.0 Insole_ver1_chi.18 | length 203.8
  Bottom Layer w0.254: Insole_ver1_chi.18@-100.2,-181.1 -98.97,-181.1 -30.296,-181.1 -17.6,-168.404 -17.6,-168.1 -17.6,-167.973 -17.806,-167.973 -17.806,-167.211 -17.368,-167.211 -17.368,-166.449 -17.806,-166.449 -17.806,-165.687 -17.368,-165.687 -17.368,-164.925 -17.806,-164.925 -17.806,-164.163 -17.368,-164.163 -17.368,-163.401 -17.806,-163.401 -17.806,-162.639 -17.368,-162.639 -17.368,-161.877 -17.806,-161.877 -17.806,-161.115 -17.368,-161.115 -17.368,-160.353 -17.806,-160.353 -17.806,-159.591 -17.368,-159.591 -17.368,-158.829 -17.806,-158.829 -17.806,-158.067 -17.368,-158.067 -17.368,-157.305 -17.806,-157.305 -17.806,-156.543 -17.368,-156.543 -17.368,-155.781 -17.806,-155.781 -17.806,-155.019 -17.368,-155.019 -17.368,-154.257 -17.806,-154.257 -17.806,-153.495 -17.6,-153.495 -17.6,-153.05 -17.6,-152.6 E169.0@-15,-150
  Bottom Layer w0.5: E169.0@-15,-150 -13.75,-148.75 -13.75,-144.75 -11.5,-142.5 E164.0@-7.5,-142.5 -6.25,-141.25 -6.25,-137.25 -4,-135 E158.0@0,-135 1.25,-133.75 1.25,-129.75 3.5,-127.5 E152.0@7.5,-127.5 8.75,-126.25 8.75,-122.25 11,-120 E146.0@15,-120 ; E146.0@15.096,-119.904 16,-119 16,-115 18.5,-112.5 E138.0@22.5,-112.5 23.5,-111.5 23.5,-107.5 26,-105 E130.0@30,-105 E121.0@37.5,-97.5
Row19: E139.0 E147.0 E153.0 E159.0 E165.0 E170.0 E175.0 Insole_ver1_chi.19 | length 168.1
  Bottom Layer w0.254: Insole_ver1_chi.19@-100.2,-181.6 -98.97,-181.6 -30.293,-181.6 -16.7,-168.007 -16.7,-167.4 -16.7,-167.273 -16.862,-167.273 -16.862,-166.511 -16.446,-166.511 -16.446,-165.749 -16.862,-165.749 -16.862,-164.987 -16.446,-164.987 -16.446,-164.225 -16.862,-164.225 -16.862,-163.463 -16.446,-163.463 -16.446,-162.701 -16.862,-162.701 -16.862,-161.939 -16.446,-161.939 -16.446,-161.177 -16.862,-161.177 -16.862,-160.415 -16.446,-160.415 -16.446,-159.653 -16.7,-159.653 -16.7,-159.5 -16.7,-159.2 E175.0@-15,-157.5
  Bottom Layer w0.5: E175.0@-15,-157.5 E170.0@-7.5,-150 E165.0@0,-142.5 E159.0@7.5,-135 E153.0@15,-127.5 E147.0@22.5,-120 E139.0@30,-112.5
Row20: E154.0 E160.0 E166.0 E171.0 E176.0 E181.0 Insole_ver1_chi.20 | length 157.7
  Bottom Layer w0.254: Insole_ver1_chi.20@-100.2,-182.1 -98.97,-182.1 -30.29,-182.1 -16,-167.81 -16,-166 E181.0@-15,-165
  Bottom Layer w0.5: E181.0@-15,-165 -14,-164 -14,-160.25 -11.25,-157.5 E176.0@-7.5,-157.5 -6.5,-156.5 -6.5,-152.5 -4,-150 E171.0@0,-150 1.25,-148.75 1.25,-144.75 3.5,-142.5 E166.0@7.5,-142.5 ; E166.0@7.596,-142.404 7.731,-142.404 8.5,-141.635 8.5,-137.5 11,-135 E160.0@15,-135 16,-134 16,-130.25 18.75,-127.5 E154.0@22.5,-127.5
Row21: E161.0 E167.0 E172.0 E177.0 E182.0 E187.0 E193.0 Insole_ver1_chi.21 | length 142.4
  Bottom Layer w0.254: Insole_ver1_chi.21@-100.2,-182.6 -98.97,-182.6 -25.1,-182.6 E193.0@-22.5,-180
  Bottom Layer w0.5: E193.0@-22.5,-180 E187.0@-15,-172.5 E182.0@-7.5,-165 E172.0@7.5,-150 E167.0@15,-142.5 E161.0@22.5,-135
Row22: E168.0 E173.0 E178.0 E183.0 E188.0 E194.0 E200.0 Insole_ver1_chi.22 | length 155.6
  Bottom Layer w0.254: Insole_ver1_chi.22@-100.2,-183.1 -98.97,-183.1 -28.9,-183.1 -24.643,-187.357 -22.643,-187.357 E200.0@-22.5,-187.5
  Bottom Layer w0.5: E200.0@-22.5,-187.5 -14,-179 -14,-174.75 -11.75,-172.5 E188.0@-7.5,-172.5 -6.5,-171.5 -6.5,-167.25 -4.25,-165 E183.0@0,-165 1,-164 1,-159.75 3.25,-157.5 E178.0@7.5,-157.5 8.5,-156.5 8.5,-152.25 10.75,-150 E173.0@15,-150 16,-149 16,-144.75 18.25,-142.5 E168.0@22.5,-142.5
Row23: E174.0 E179.0 E184.0 E189.0 E195.0 E201.0 Insole_ver1_chi.23 | length 141.6
  Bottom Layer w0.254: Insole_ver1_chi.23@-100.2,-183.6 -98.97,-183.6 -28.903,-183.6 -24.79,-187.713 -24.712,-187.713 -22.77,-189.655 -17.155,-189.655 E201.0@-15,-187.5
  Bottom Layer w0.5: E201.0@-15,-187.5 E195.0@-7.5,-180 E189.0@0,-172.5 E184.0@7.5,-165 E179.0@15,-157.5 E174.0@22.5,-150
Row24: E180.0 E185.0 E190.0 E196.0 E202.0 E208.0 Insole_ver1_chi.24 | length 154.9
  Bottom Layer w0.254: Insole_ver1_chi.24@-100.2,-184.1 -98.97,-184.1 -28.906,-184.1 -22.995,-190.011 -22.987,-190.011 -17.997,-195 E208.0@-15,-195
  Bottom Layer w0.5: E208.0@-15,-195 -14,-194 -14,-190 -11.5,-187.5 E202.0@-7.5,-187.5 -6.5,-186.5 -6.5,-182.5 -4,-180 E196.0@0,-180 1.5,-178.5 1.5,-174.25 3.25,-172.5 E190.0@7.5,-172.5 8.5,-171.5 8.5,-167.25 10.75,-165 E185.0@15,-165 16.25,-163.75 16.25,-159.5 18.25,-157.5 E180.0@22.5,-157.5
Row25: E186.0 E191.0 E197.0 E203.0 E209.0 E215.0 Insole_ver1_chi.25 | length 148
  Bottom Layer w0.254: Insole_ver1_chi.25@-100.2,-184.6 -98.97,-184.6 -28.909,-184.6 -23.142,-190.366 -23.134,-190.366 -16.8,-196.7 -16.8,-200.798 -15.098,-202.5 E215.0@-15,-202.5
  Bottom Layer w0.5: E215.0@-15,-202.5 E186.0@22.5,-165
Row26: E192.0 E198.0 E204.0 E210.0 E216.0 E222.0 Insole_ver1_chi.26 | length 167
  Bottom Layer w0.254: Insole_ver1_chi.26@-100.2,-185.1 -28.95,-185.1 -17.156,-196.894 -17.156,-208.144 -15.519,-209.781 -15.421,-209.781 -15.202,-210 E222.0@-15,-210
  Bottom Layer w0.5: E222.0@-15,-210 -14,-209 -14,-205 -11.5,-202.5 E216.0@-7.5,-202.5 -6.5,-201.5 -6.5,-197.25 -4.25,-195 E210.0@0,-195 1,-194 1,-190 3.5,-187.5 E204.0@7.5,-187.5 8.5,-186.5 8.5,-182.5 11,-180 E198.0@15,-180 16.25,-178.75 16.25,-174.75 18.5,-172.5 E192.0@22.5,-172.5
Row27: E199.0 E205.0 E211.0 E217.0 E223.0 E229.0 Insole_ver1_chi.27 | length 162
  Bottom Layer w0.254: Insole_ver1_chi.27@-100.2,-185.6 -99.354,-185.6 -28.953,-185.6 -17.511,-197.042 -17.511,-208.292 -17.5,-208.303 -17.5,-214.812 -15,-217.312 E229.0@-15,-217.5
  Bottom Layer w0.5: E229.0@-15,-217.5 E223.0@-7.5,-210 E217.0@0,-202.5 E199.0@22.5,-180
Row28: E206.0 E212.0 E218.0 E224.0 E230.0 E236.0 Insole_ver1_chi.28 | length 180.8
  Bottom Layer w0.254: Insole_ver1_chi.28@-100.2,-186.1 -28.975,-186.1 -17.867,-197.208 -17.867,-214.948 -16,-216.815 -16,-224 E236.0@-15,-225
  Bottom Layer w0.5: E236.0@-15,-225 -14,-224 -14,-220 -11.5,-217.5 E230.0@-7.5,-217.5 -6.5,-216.5 -6.5,-212.5 -4,-210 E224.0@0,-210 1,-209 1,-205 3.5,-202.5 E218.0@7.5,-202.5 8.5,-201.5 8.5,-197.5 11,-195 E212.0@15,-195 16,-194 16,-189.75 18.25,-187.5 E206.0@22.5,-187.5
Row29: E207.0 E213.0 E219.0 E225.0 E231.0 E237.0 Insole_ver1_chi.29 | length 213.7
  Bottom Layer w0.254: Insole_ver1_chi.29@-100.2,-186.6 -99,-186.6 -28.978,-186.6 -18.222,-197.356 -18.222,-215.095 -16.4,-216.918 -16.4,-226.4 -15.5,-227.3 -9.8,-227.3 E237.0@-7.5,-225 ; E231.0@0,-217.5 E237.0@-7.5,-225 ; E225.0@7.5,-210 E237.0@-7.5,-225
  Bottom Layer w0.5: E237.0@-7.5,-225 E219.0@15,-202.5 22.596,-194.904 22.596,-194.447 23.254,-193.788 23.254,-190.246 26,-187.5 E207.0@30,-187.5
Row30: E214.0 E220.0 E226.0 E232.0 E238.0 E243.0 Insole_ver1_chi.30 | length 192.1
  Bottom Layer w0.254: Insole_ver1_chi.30@-100.2,-187.1 -29.025,-187.1 -18.578,-197.547 -18.578,-215.243 -16.756,-217.065 -16.756,-226.547 -10.803,-232.5 E243.0@-7.5,-232.5
  Bottom Layer w0.5: E243.0@-7.5,-232.5 -6.5,-231.5 -6.5,-227.75 -3.75,-225 0.053,-225 1,-224.053 1,-219.75 3.25,-217.5 E232.0@7.5,-217.5 8.5,-216.5 8.5,-212.5 11,-210 E226.0@15,-210 16,-209 16,-205.25 18.75,-202.5 E220.0@22.5,-202.5 23.254,-201.746 23.254,-197.746 26,-195 E214.0@30,-195
Row31: E221.0 E227.0 E228.0 E233.0 E235.0 E239.0 E242.0 E244.0 E248.0 E249.0 Insole_ver1_chi.31 | length 222.6
  Bottom Layer w0.254: Insole_ver1_chi.31@-100.2,-187.6 -99,-187.6 -29.028,-187.6 -18.934,-197.694 -18.934,-215.39 -17.111,-217.212 -17.111,-226.695 -8.4,-235.406 -8.4,-239.1 E249.0@-7.5,-240 ; E248.0@30,-232.5 29.881,-232.381 29.881,-231.749 28.9,-230.768 28.9,-228.8 30.9,-226.8 30.9,-225.9 E242.0@30,-225 29.3,-224.3 29.3,-221.7 30.631,-220.369 30.631,-218.131 E235.0@30,-217.5 29.1,-216.6 29.1,-214.7 30.8,-213 30.8,-210.8 E228.0@30,-210 29.2,-209.2 29.2,-206.5 30.644,-205.056 30.644,-203.144 E221.0@30,-202.5
  Bottom Layer w0.5: E249.0@-7.5,-240 E244.0@0,-232.5 E233.0@15,-217.5 E227.0@22.5,-210 23.75,-208.75 23.75,-205.75 27,-202.5 E221.0@30,-202.5
Row32: E234.0 E240.0 E241.0 E245.0 E246.0 E247.0 E250.0 E251.0 E252.0 E254.0 Insole_ver1_chi.32 | length 227
  Bottom Layer w0.254: Insole_ver1_chi.32@-99.777,-188.1 -29.075,-188.1 -19.289,-197.886 -19.289,-215.537 -17.467,-217.36 -17.467,-226.842 -8.9,-235.409 -8.9,-241.2 -7.945,-242.155 -2.155,-242.155 E250.0@0,-240
  Bottom Layer w0.5: E250.0@0,-240 E245.0@7.5,-232.5 8.4,-233.4 8.4,-236.1 6.4,-238.1 6.4,-239.2 6.498,-239.2 7.079,-239.781 7.298,-240 E251.0@7.5,-240 E252.0@15,-240 16.3,-238.7 16.3,-237.7 13.8,-235.2 13.8,-233.7 E246.0@15,-232.5 16.2,-231.3 16.2,-230.7 13.8,-228.3 13.8,-226.2 E240.0@15,-225 E234.0@22.5,-217.5 23.131,-218.131 23.131,-220.769 21.869,-222.031 21.869,-224.595 22.018,-224.744 22.042,-224.744 22.298,-225 E241.0@22.5,-225 23.7,-226.2 23.7,-227.3 21.6,-229.4 21.6,-231.6 E247.0@22.5,-232.5 22.702,-232.5 22.921,-232.719 23.019,-232.719 23.6,-233.3 23.6,-234.1 21.3,-236.4 21.3,-238.8 E254.0@22.5,-240
pads on no net: Insole_ver1_chi.MP1 Insole_ver1_chi.MP2

## Silkscreen, mask and mechanical layers (free items; w line width, h text height)
Mechanical 1:
  circle w0.3: c11.25,-11.25 r1.5
  circle w0.3: c11.25,-18.75 r1.5
  circle w0.3: c3.75,-26.25 r1.5
  circle w0.3: c18.75,-26.25 r1.5
  circle w0.3: c11.25,-33.75 r1.5
  circle w0.3: c-11.25,-41.25 r1.5
  circle w0.3: c3.75,-41.25 r1.5
  circle w0.3: c18.75,-41.25 r1.5
  circle w0.3: c11.25,-48.75 r1.5
  circle w0.3: c-11.25,-56.25 r1.5
  circle w0.3: c3.75,-56.25 r1.5
  circle w0.3: c18.75,-56.25 r1.5
  circle w0.3: c-11.25,-206.25 r1.5
  circle w0.3: c11.25,-3.75 r1.5
  circle w0.3: c-3.75,-18.75 r1.5
  circle w0.3: c26.25,-18.75 r1.5
  circle w0.3: c-11.25,-26.25 r1.5
  circle w0.3: c-3.75,-33.75 r1.5
  circle w0.3: c26.25,-33.75 r1.5
  circle w0.3: c26.25,-198.75 r1.5
  circle w0.3: c26.25,-191.25 r1.5
  circle w0.3: c18.75,-191.25 r1.5
  circle w0.3: c18.75,-206.25 r1.5
  circle w0.3: c11.25,-213.75 r1.5
  circle w0.3: c11.25,-198.75 r1.5
  circle w0.3: c11.25,-183.75 r1.5
  circle w0.3: c18.75,-176.25 r1.5
  circle w0.3: c11.25,-168.75 r1.5
  circle w0.3: c18.75,-161.25 r1.5
  circle w0.3: c11.25,-153.75 r1.5
  circle w0.3: c18.75,-146.25 r1.5
  circle w0.3: c18.75,-131.25 r1.5
  circle w0.3: c11.25,-138.75 r1.5
  circle w0.3: c11.25,-123.75 r1.5
  circle w0.3: c18.75,-116.25 r1.5
  circle w0.3: c26.25,-108.75 r1.5
  circle w0.3: c11.25,-108.75 r1.5
  circle w0.3: c18.75,-101.25 r1.5
  circle w0.3: c26.25,-93.75 r1.5
  circle w0.3: c11.25,-93.75 r1.5
  circle w0.3: c33.75,-86.25 r1.5
  circle w0.3: c18.75,-86.25 r1.5
  circle w0.3: c26.25,-78.75 r1.5
  circle w0.3: c11.25,-78.75 r1.5
  circle w0.3: c41.25,-63.75 r1.5
  circle w0.3: c33.75,-71.25 r1.5
  circle w0.3: c18.75,-71.25 r1.5
  circle w0.3: c26.25,-63.75 r1.5
  circle w0.3: c11.25,-63.75 r1.5
  circle w0.3: c33.75,-56.25 r1.5
  circle w0.3: c26.25,-48.75 r1.5
  circle w0.3: c33.75,-41.25 r1.5
  circle w0.3: c33.75,-26.25 r1.5
  circle w0.3: c26.25,-11.25 r1.5
  circle w0.3: c18.75,-3.75 r1.5
  circle w0.3: c-3.75,-11.25 r1.5
  circle w0.3: c-3.75,-48.75 r1.5
  circle w0.3: c-18.75,-48.75 r1.5
  circle w0.3: c-26.25,-56.25 r1.5
  circle w0.3: c-3.75,-63.75 r1.5
  circle w0.3: c-18.75,-63.75 r1.5
  circle w0.3: c-11.25,-71.25 r1.5
  circle w0.3: c-26.25,-71.25 r1.5
  circle w0.3: c-11.25,-86.25 r1.5
  circle w0.3: c-3.75,-78.75 r1.5
  circle w0.3: c-18.75,-78.75 r1.5
  circle w0.3: c-3.75,-93.75 r1.5
  circle w0.3: c-11.25,-101.25 r1.5
  circle w0.3: c-18.75,-93.75 r1.5
  circle w0.3: c-26.25,-86.25 r1.5
  circle w0.3: c-26.25,-101.25 r1.5
  circle w0.3: c-18.75,-108.75 r1.5
  circle w0.3: c-3.75,-108.75 r1.5
  circle w0.3: c-11.25,-116.25 r1.5
  circle w0.3: c-26.25,-116.25 r1.5
  circle w0.3: c-3.75,-123.75 r1.5
  circle w0.3: c-18.75,-123.75 r1.5
  circle w0.3: c-11.25,-131.25 r1.5
  circle w0.3: c-3.75,-138.75 r1.5
  circle w0.3: c-18.75,-138.75 r1.5
  circle w0.3: c-11.25,-146.25 r1.5
  circle w0.3: c-3.75,-153.75 r1.5
  circle w0.3: c-11.25,-161.25 r1.5
  circle w0.3: c-3.75,-168.75 r1.5
  circle w0.3: c-11.25,-176.25 r1.5
  circle w0.3: c-3.75,-183.75 r1.5
  circle w0.3: c-11.25,-191 r1.5
  circle w0.3: c-3.75,-198.75 r1.5
  circle w0.3: c-3.75,-213.75 r1.5
  circle w0.3: c-11.25,-221.25 r1.5
  circle w0.3: c-3.75,-228.75 r1.5
  circle w0.3: c3.75,-221.25 r1.5
  circle w0.3: c3.75,-206.25 r1.5
  circle w0.3: c3.75,-191.25 r1.5
  circle w0.3: c3.75,-176.25 r1.5
  circle w0.3: c3.75,-161.25 r1.5
  circle w0.3: c3.75,-146.25 r1.5
  circle w0.3: c3.75,-131.25 r1.5
  circle w0.3: c3.75,-116.25 r1.5
  circle w0.3: c3.75,-101.25 r1.5
  circle w0.3: c3.75,-86.25 r1.5
  circle w0.3: c3.75,-71.25 r1.5
  circle w0.3: c3.75,-3.75 r1.5
  pour cut-out: 11.25,-5.25 cw(c11.25,-3.75) 9.75,-3.75 cw(c11.25,-3.75) 11.25,-2.25 cw(c11.25,-3.75) 12.75,-3.75 cw(c11.25,-3.75)
  lines w0.508: -39.7,-121.7 cw(c108,-97.5) -31.891,-44.289 ; -38.2,-137 ccw(c-1.9,-137.6) -38.158,-139.454 ; -35,-165.7 ccw(c-35.05,-165.15) -34.5,-165.1
Mechanical 13:
  lines w0.508: -39.7,-121.7 cw(c-230.71,-148.248) -38.193,-136.988 ; -38.171,-139.702 ccw(c51.015,-139.776) -34.5,-165.1 ; -35,-165.7 -107,-165.7 -107,-197 -26.688,-197 cw(c-26.688,-198.216) -25.472,-198.216 cw(c-324.889,-216.319) -24.997,-209.744 ccw(c44.561,-206.575) -18.246,-236.636 ccw(c6.5,-223.767) 13.5,-250.767 ccw(c1.651,-216.562) 33.078,-234.527 ; -31.897,-44.287 cw(c99.541,-84.886) -16.388,-10.827 cw(c7.586,-24.741) -13.019,-6.2 cw(c4.457,-19.243) -10.2,-3.097 cw(c13.815,-22.782) -6.147,1.004 cw(c12.343,-16.668) 21.234,7.314 cw(c1.326,-29.86) 42.805,-22.261 cw(c-89.6,-59.362) 46.211,-80.88 cw(c-115.088,-37.468) 36.225,-108.222 ccw(c93.136,-141.857) 27.287,-147.697 ccw(c141.929,-145.126) 31.518,-176.091 ccw(c123.348,-167.938) 33.82,-189.934 cw(c-21.756,-204.191) 35.41,-199.289 cw(c-37.418,-211.967) 32.957,-234.593